# EAGLE board fMeter-preamp (EAGLE 5.07)
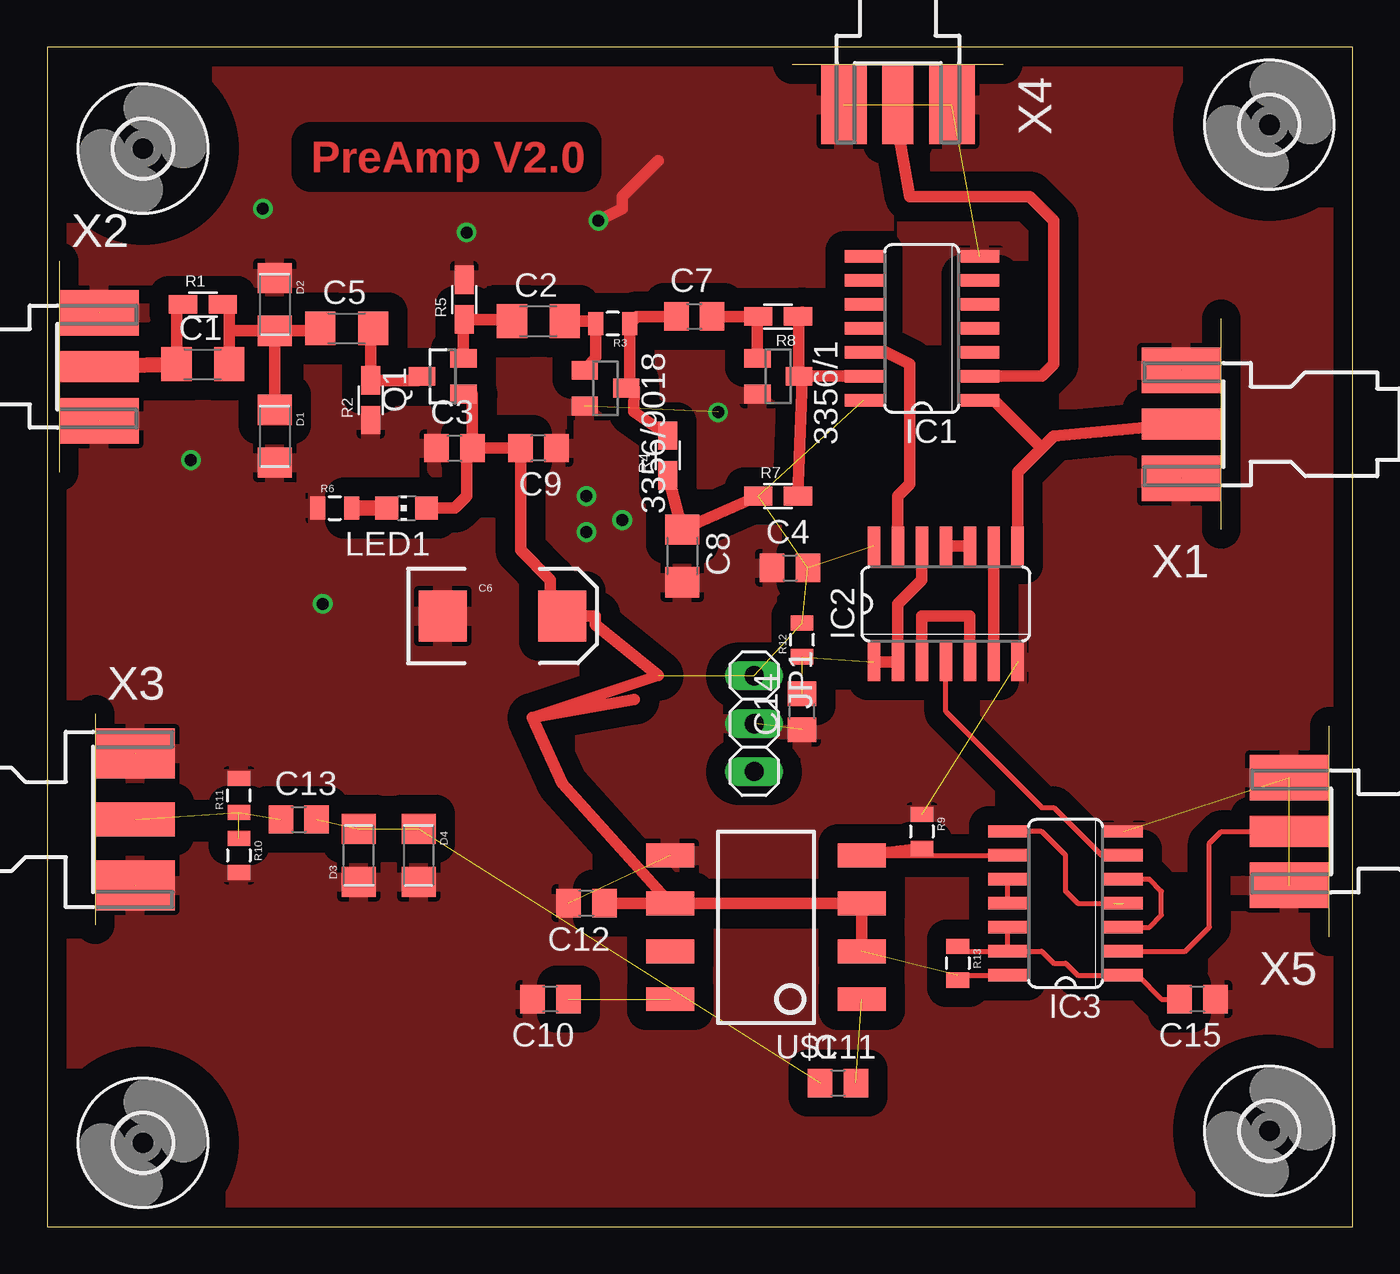
[diagram p0: board, top side]
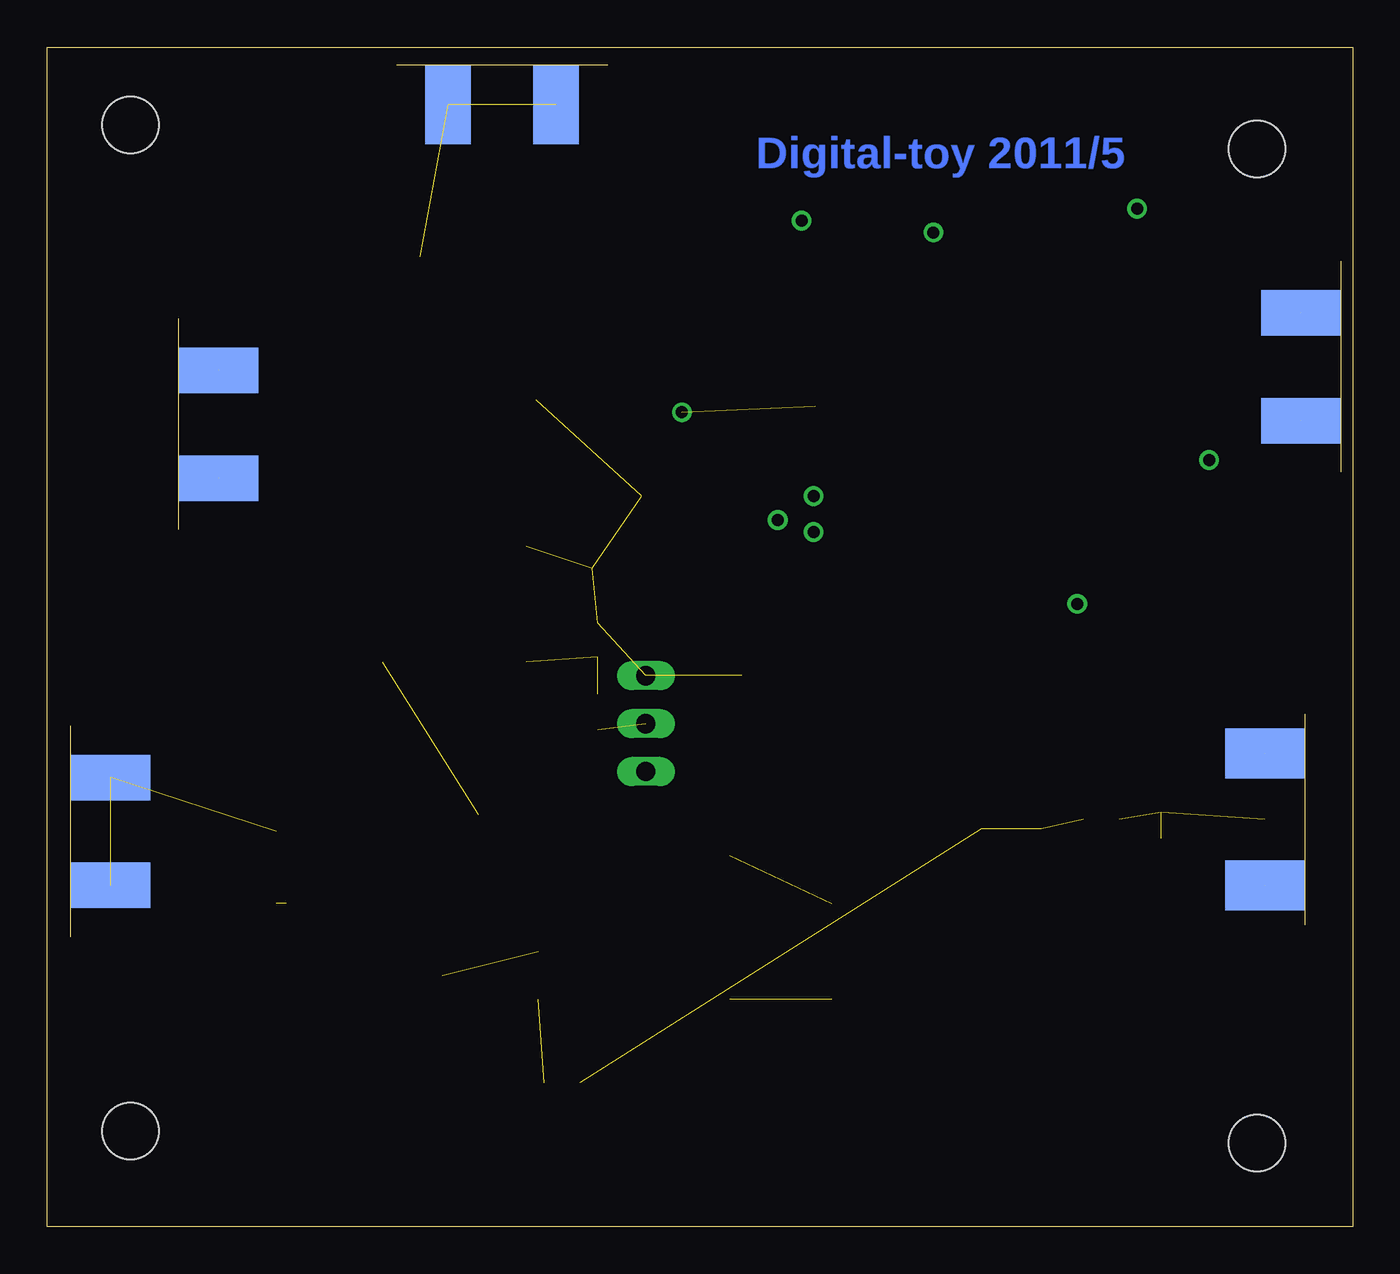
[diagram p1: board, bottom side, seen from below]

Size 69.19 x 62.53 mm. Coordinates in mm from the lower left corner, seen from the top.
Outline: 0,0 69.19,0 69.19,62.53 0,62.53 0,0
Copper layers (1*16): Top 0.035mm / dielectric 1.5mm / Bottom 0.035mm
Design rules "default": minimum track width 10mil, minimum drill 24mil, track to track 8mil, track to pad 8mil, pad to pad 8mil, via to via 8mil, smd to smd 8mil, copper to edge 40mil, drill to drill 8mil, minimum pad ring 10mil, minimum via ring 8mil, stop-mask expansion 4mil, vias tented up to drill 0mil, thermal gap 10mil

## Footprints (pad centres in the part's own frame; a part is rotated, then mirrored left to right if it is on the bottom)
SOT23-BEC = smd 1 x 1.4: B -0.95,-1.1; C 0,1.1; E 0.95,-1.1
C1206 = smd 1.6 x 1.8: 1 -1.4,0; 2 1.4,0
C0805 = smd 1.3 x 1.5: 1 -0.95,0; 2 0.95,0
EIA7343 = smd 2.55 x 2.7: A 3.17,0; C -3.17,0
1206-DIODE = smd 1.6 x 1.8: A -1.4,0; K 1.4,0
3,0 = hole 3: 0,0
SO14 = smd 0.66 x 2.032: 1 -3.81,-3.073; 2 -2.54,-3.073; 3 -1.27,-3.073; 4 0,-3.073; 5 1.27,-3.073; 6 2.54,-3.073; 7 3.81,-3.073; 8 3.81,3.073; 9 2.54,3.073; 10 1.27,3.073; 11 0,3.073; 12 -1.27,3.073; 13 -2.54,3.073; 14 -3.81,3.073
1X03 = drill 1.016 long: 1 -2.54,0; 2 0,0; 3 2.54,0
CHIP-LED0805 = smd 1.2 x 1.2: A 0,-1.05; C 0,1.05
SOT23 = smd 1 x 1.4: 1 -0.95,-1.1; 2 0.95,-1.1; 3 0,1.1
R0805W = smd 1.5 x 1: 1 -1.052,0; 2 1.052,0
0805 = smd 0.8 x 1.2: 1 -0.9,0; 2 0.9,0
DIP8-RF = smd 1.27 x 2.54: P$1 0,-3.81; P$2 2.54,-3.81; P$3 5.08,-3.81; P$4 7.62,-3.81; P$5 7.62,6.35; P$6 5.08,6.35; P$7 2.54,6.35; P$8 0,6.35
SMA-KE = smd 4.191 x 1.651: 1 2.115,0 | smd 4.191 x 2.413: G@1 2.115,2.86; G@2 2.115,-2.86 | smd 4.191 x 2.413 bottom: G@3 2.115,2.86; G@4 2.115,-2.86
J502-ND-142-0711-821/826 = smd 4.191 x 1.778: 1 2.115,0 | smd 4.191 x 2.667: G@1 2.115,3.495; G@2 2.115,-3.495 | smd 4.191 x 2.667 bottom: G@3 2.115,3.495; G@4 2.115,-3.495

## Placement (x,y rotation side)
3356/1  [SOT23-BEC]  38.73,45.09 270 top
3356/9018  [SOT23-BEC]  29.59,44.45 270 top
C1  331  [C1206]  8.26,45.72 0 top
C2  10uF  [C1206]  26.04,48.01 0 top
C3  103  [C0805]  21.59,41.27 0 top
C4  103  [C0805]  39.37,34.92 0 top
C5  10uF  [C1206]  15.88,47.62 0 top
C6  10uf  [EIA7343]  24.13,32.38 0 top
C7  10uF  [C0805]  34.29,48.26 0 top
C8  10uF  [C1206]  33.66,35.56 270 top
C9  103  [C0805]  26.04,41.27 180 top
C10  102  [C0805]  26.67,12.06 180 top
C11  102  [C0805]  41.91,7.62 0 top
C12  104  [C0805]  28.57,17.14 180 top
C13  102  [C0805]  13.34,21.59 0 top
C14  102  [C0805]  40.01,27.3 90 top
C15  102  [C0805]  60.96,12.06 180 top
D1  4148  [1206-DIODE]  12.06,41.91 270 top
D2  4148  [1206-DIODE]  12.06,48.9 270 top
D3  [1206-DIODE]  16.51,19.68 90 top
D4  [1206-DIODE]  19.68,19.68 270 top
H1  MOUNT-HOLE3.0  [3,0]  5.08,4.45 0 top
H2  MOUNT-HOLE3.0  [3,0]  64.77,58.42 0 top
H3  MOUNT-HOLE3.0  [3,0]  5.08,57.15 0 top
H4  MOUNT-HOLE3.0  [3,0]  64.77,5.08 0 top
IC1  SN74AHCT14DR  [SO14]  46.35,47.62 90 top
IC2  74HC00D  [SO14]  47.62,33.02 0 top
IC3  74HC00D  [SO14]  53.98,17.14 90 top
JP1  [1X03]  37.47,26.67 270 top
LED1  RED  [CHIP-LED0805]  19.05,38.1 90 top
Q1  SST5485  [SOT23]  20.95,45.09 90 top
R1  100R  [R0805W]  8.26,48.9 0 top
R2  1M  [R0805W]  17.14,43.81 90 top
R3  9.1k  [0805]  29.97,47.88 180 top
R4  560R  [R0805W]  32.89,40.89 90 top
R5  1k  [R0805W]  22.1,49.15 90 top
R6  1.3k  [0805]  15.24,38.1 0 top
R7  560R  [R0805W]  38.73,38.73 0 top
R8  9.1k  [R0805W]  38.73,48.26 180 top
R9  2k  [0805]  46.35,20.95 270 top
R10  100R  [0805]  10.16,19.68 270 top
R11  100R  [0805]  10.16,22.86 90 top
R12  100R  [0805]  40.01,31.11 90 top
R13  100R  [0805]  48.26,13.97 270 top
U$1  MB504-RF  [DIP8-RF]  39.37,12.06 90 top
X1  SMA--KE  [SMA-KE]  62.23,42.55 180 top
X2  SMA--KE  [SMA-KE]  0.64,45.59 0 top
X3  SMA-KE  [J502-ND-142-0711-821/826]  2.54,21.59 0 top
X4  SMA--KE  [SMA-KE]  45.09,61.59 270 top
X5  SMA--KE  [SMA-KE]  67.94,20.95 180 top

## Library data of the parts
3356/1 3356/9018 C1-C15 D1-D4 JP1 R1-R13 = digital-toy
H1-H4 = holes
IC1-IC3 = 74xx-eu
LED1 = led
Q1 = transistor-fet
U$1 X1 X2 X4 X5 = dtoy-RF
X3 = con-coax

## Nets
C: JP1.3
GND: 3356/1.E 3356/9018.E C3.1 C4.1 C6.C C8.2 C9.1 C10.2 C12.2 C14.1 C15.1 D1.K D2.A D3.A D4.K IC1.7 IC2.7 IC3.7 JP1.2 R2.1 R5.2 R6.1 R9.1 R10.2 R11.2 U$1.P$5 X1.G@1 X1.G@2 X1.G@3 X1.G@4 X2.G@1 X2.G@2 X2.G@3 X2.G@4 X3.G@1 X3.G@2 X3.G@3 X3.G@4 X4.G@1 X4.G@2 X4.G@3 X4.G@4 X5.G@1 X5.G@2 X5.G@3 X5.G@4
N$1: C1.1 R1.1 X2.1
N$2: C1.2 C5.1 D1.A D2.K R1.2
N$3: C2.1 Q1.2 R5.1
N$4: 3356/9018.B C2.2 R3.2
N$5: 3356/9018.C C7.1 R3.1 R4.2
N$6: C5.2 Q1.3 R2.2
N$7: 3356/1.C IC1.13 R7.2 R8.1
N$8: IC1.12 IC2.13
N$9: 3356/1.B C7.2 R8.2
N$10: C10.1 U$1.P$8
N$11: C11.2 U$1.P$1
N$12: C11.1 C13.2 D3.K D4.A
N$13: IC2.4 IC3.6
N$14: C13.1 R10.1 R11.1 X3.1
N$15: IC2.3 IC2.5
N$16: IC2.10 IC2.11
N$17: IC2.6 IC2.9
N$18: C14.2 IC2.1 IC2.2 IC2.12 R12.1
N$19: IC1.1 IC2.8 X1.1
N$20: IC1.2 X4.1
N$21: IC3.2 X5.1
N$22: IC3.3 IC3.5
N$23: C15.2 IC3.1 IC3.12 IC3.13 R13.1
N$24: IC3.10 IC3.11
N$26: IC3.4 IC3.8
N$28: IC3.9 R9.2 U$1.P$4
N$32: LED1.C R6.2
VCC: C3.2 C4.2 C6.A C8.1 C9.2 C12.1 IC1.14 IC2.14 IC3.14 JP1.1 LED1.A Q1.1 R4.1 R7.1 R12.2 R13.2 U$1.P$2 U$1.P$3 U$1.P$6

## Tracks (layer width: path | path; a pad name or v marks a point on that pad's centre or on a via)
GND  (via drill 0.64)  (18 unrouted)
  Top 0.61: 32.38,56.52 30.48,54.61 30.48,53.98 v29.21,53.34
  other vias: 11.43,53.98 22.23,52.7 14.61,33.02 7.62,40.64 35.56,43.18 28.57,38.73 28.57,36.83 30.48,37.47
  pour Top (isolate 1.016): -10.79,88.27 70.48,96.52 130.18,39.37 137.16,-24.13 150.5,-40.01 -10.16,-40.01 -38.73,22.86 -31.11,48.26
N$1
  Top 0.61: C1.1 6.86,48.55 R1.1
  Top 0.813: X2.1 C1.1
N$2
  Top 0.61: C1.2 9.65,47.62 | 9.65,47.62 9.65,48.77 9.53,48.9 R1.2 | D2.K 9.79,47.49 9.65,47.62 | D2.K D1.A | D2.K 14.35,47.49 C5.1
N$3
  Top 0.61: Q1.2 22.05,48.05 R5.1 24.54,48.1 C2.1
N$4
  Top 0.61: C2.2 28.95,48.01 R3.2 29.07,46.09 3356/9018.B
N$5
  Top 0.61: C7.1 31.25,48.26 R3.1 30.87,44.63 3356/9018.C 30.48,44.24 31.11,44.45 31.08,43.22 R4.2
N$6
  Top 0.61: C5.2 17.14,47.49 R2.2 19.64,44.87 Q1.3
N$7
  Top 0.61: R7.2 40.01,44.91 3356/1.C | 3356/1.C 39.84,48.21 R8.1 40.01,48.48 | 3356/1.C IC1.13
N$8
  Top 0.61: IC2.13 45.09,38.73 45.72,39.37 45.72,45.72 44.45,46.35 IC1.12
N$9
  Top 0.61: 3356/1.B 37.63,48.21 R8.2 C7.2 34.92,48.26
N$10  (1 unrouted)
N$11  (1 unrouted)
N$12  (3 unrouted)
N$13
  Top 0.254: IC3.6 55.88,19.68 53.34,22.23 52.7,22.23 47.62,27.3 IC2.4
N$14  (3 unrouted)
N$15
  Top 0.61: IC2.3 46.35,32.38 48.9,32.38 IC2.5
N$16
  Top 0.61: IC2.11 IC2.10
N$17
  Top 0.61: IC2.6 IC2.9
N$18  (2 unrouted)
  Top 0.61: IC2.1 IC2.2 45.09,33.02 46.35,34.29 IC2.12 46.35,36.2
N$19
  Top 0.61: IC2.8 51.44,40.01 52.7,41.27 | 52.7,41.27 53.34,41.91 X1.1 | IC1.1 50.16,43.81 52.7,41.27
N$20
  Top 0.61: X4.1 45.09,58.21 45.72,54.61 52.07,54.61 53.34,53.34 53.34,45.72 52.7,45.09 IC1.2
N$21
  Top 0.254: IC3.2 60.33,14.61 61.59,15.88 61.59,20.32 62.23,20.95 X5.1
N$22
  Top 0.254: IC3.5 58.42,18.41 59.05,17.78 59.05,16.51 58.42,15.88 IC3.3
N$23
  Top 0.254: IC3.13 52.7,14.61 53.34,13.97 53.98,13.97 54.61,13.34 IC3.1 57.78,13.34 59.05,12.06 C15.2 | IC3.13 IC3.12 | IC3.13 48.26,14.61 R13.1
N$24
  Top 0.254: IC3.11 IC3.10
N$26  (1 unrouted)
  Top 0.254: IC3.8 52.7,20.95 53.98,19.68 53.98,17.78 54.61,17.14 56.52,17.14
N$28
  Top 0.254: U$1.P$4 IC3.9
  Top 0.61: U$1.P$4 R9.2
N$32
  Top 0.813: R6.2 LED1.C
VCC  (7 unrouted)
  Top 0.254: IC3.14 48.26,13.34 R13.2
  Top 0.61: LED1.A 21.59,38.1 22.23,38.73 22.23,40.96 C3.2 | Q1.1 22.54,44.13 C3.2 | C3.2 C9.2 25.09,35.88 26.67,34.29 26.67,33.02 C6.A 29.05,32.38 29.05,31.91 32.38,29.21 25.72,26.99 | U$1.P$2 U$1.P$3 U$1.P$6 | 37.47,38.73 R7.1 C8.1 R4.1 | C12.1 U$1.P$6 | U$1.P$6 27.3,23.5 25.72,26.99 | 25.72,26.99 31.11,27.94

## Text on the board
Top: PreAmp V2.0
Bottom: Digital-toy 2011/5